# Altium PCB Camera_pcb.PcbDoc
Units mm, origin at the board's own origin, x right, y up, seen from the top; angles counter-clockwise.
Board outline 104 x 50 mm, 2 copper layers (Top Layer, Bottom Layer), stack 1.571 mm thick; 54 components, 62 nets, 286 pads, 164 vias.
Unrouted connection lines stored in the file: 1.
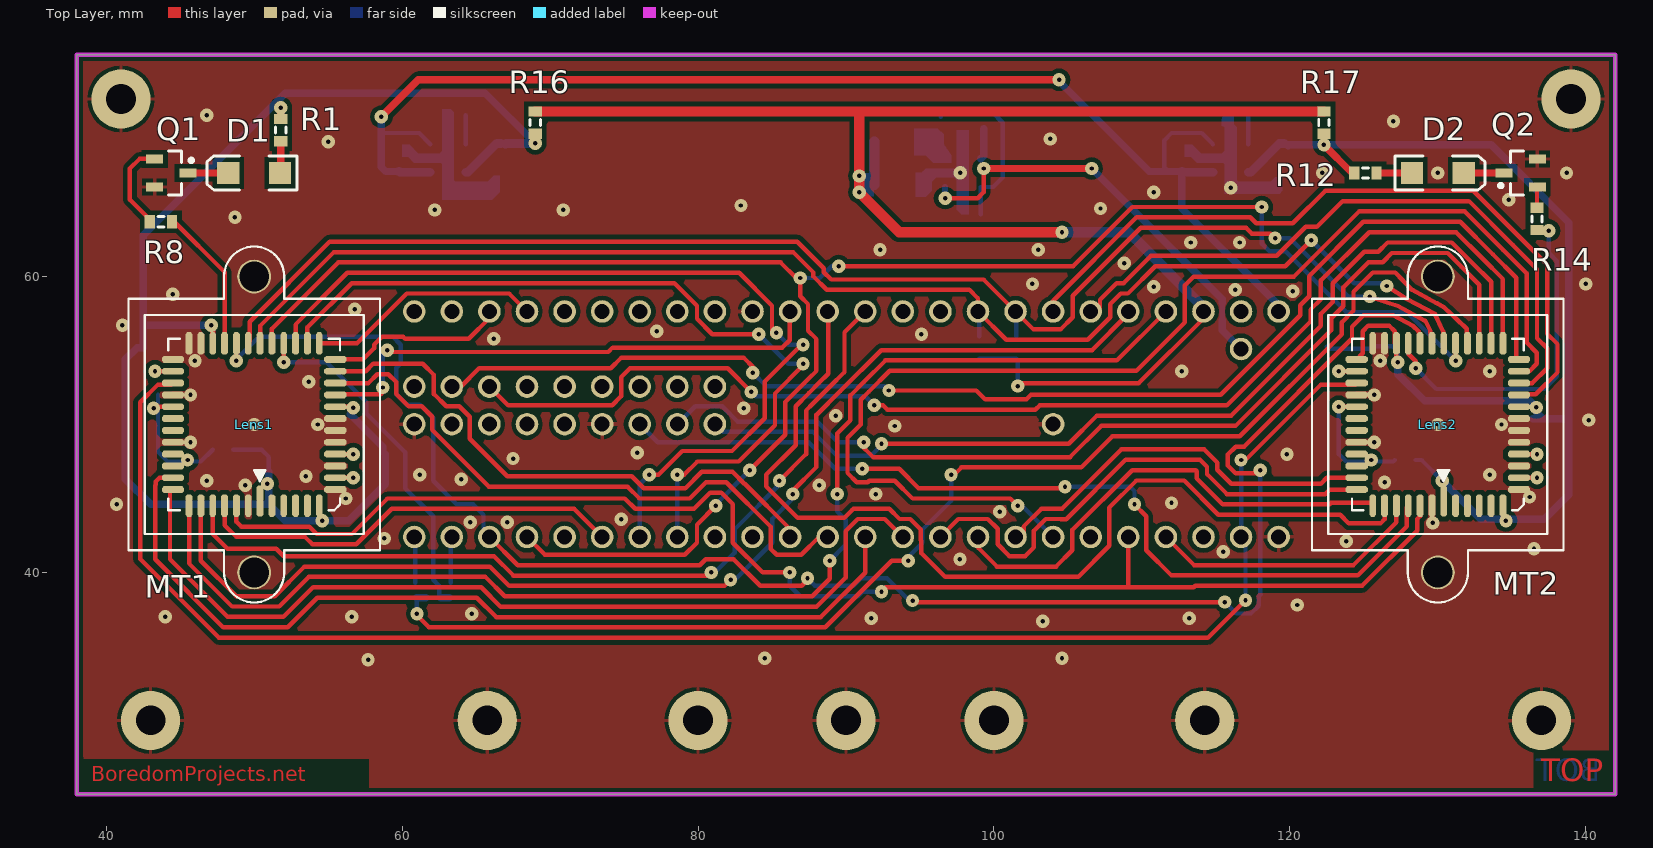
[diagram p0: Top Layer view]
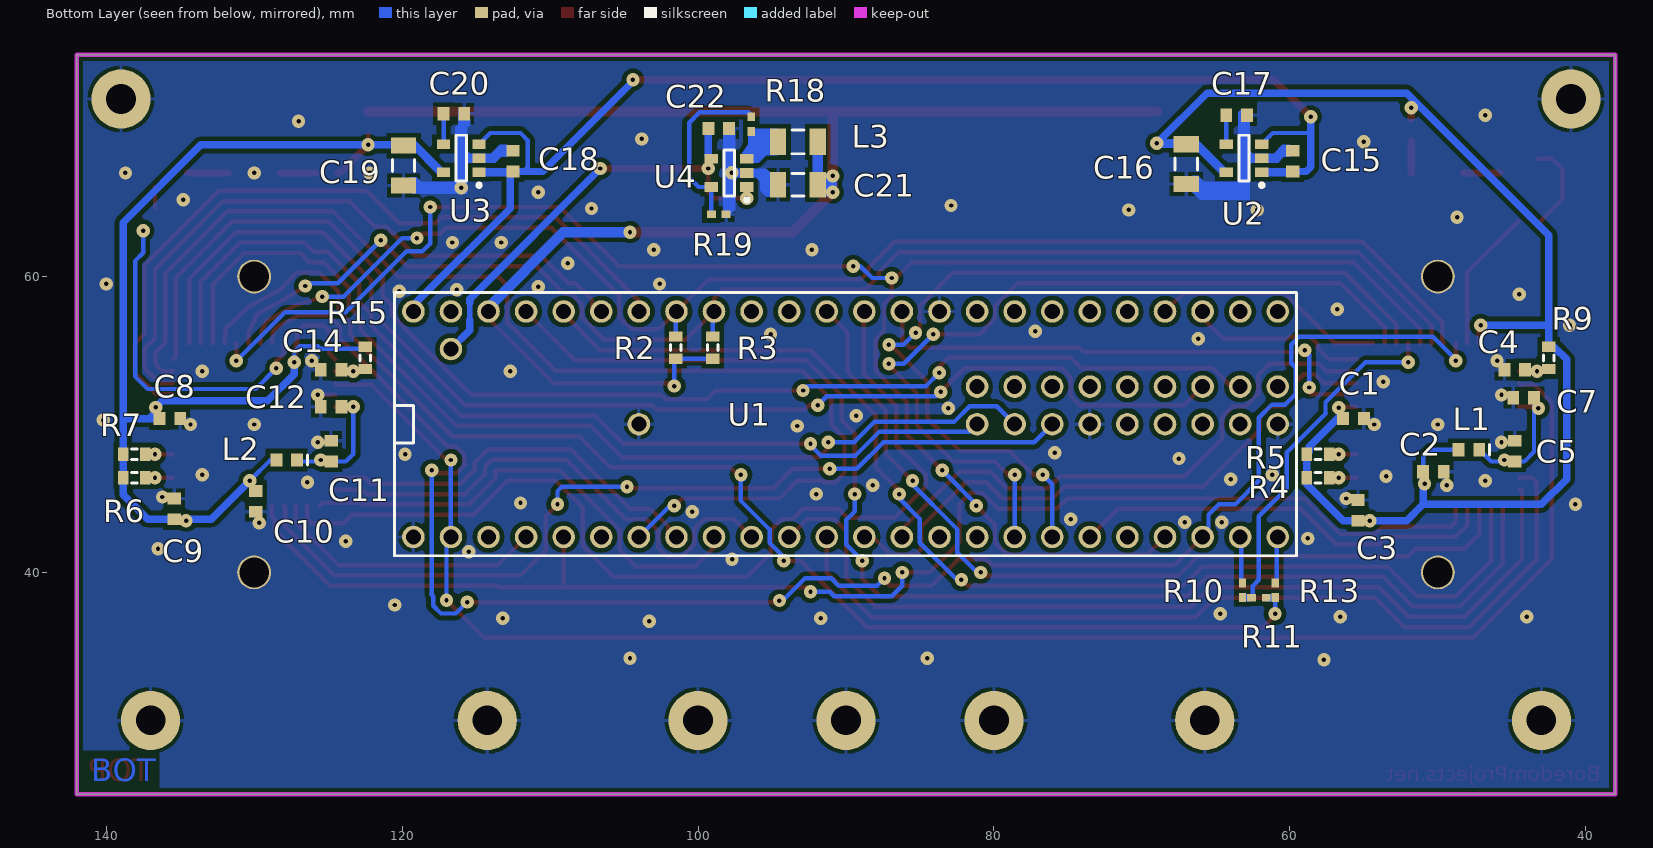
[diagram p1: Bottom Layer view, seen from below]

## Layer stack, top to bottom
Top Solder: solder mask 0.0102, Solder Resist, Dk 3.5
Top Layer: signal copper 0.0356
Dielectric 1: core 1.5, FR-4, Dk 4.2
Bottom Layer: signal copper 0.0356
Bottom Solder: solder mask 0.0102, Solder Resist, Dk 3.5

## Board outline
38,25 142,25 142,75 38,75

## Design rules (kind name [scope] priority, off if disabled: settings)
Clearance [All] p1: gap=0.3 except(0.4: Track-Track)
ComponentClearance [All] p1 off: gap=0.254 collisioncheckmode=3 verticalgap=0.254 showdistances=FALSE
HoleSize [All] p1: absolutevalues=TRUE maxlimit=2.54 minlimit=0.3 maxpercent=80.000 minpercent=20.000
MinimumSolderMaskSliver [All] p1: minsoldermaskwidth=0.125
PasteMaskExpansion [All] p1: expansion=-0.05
PolygonConnect PolygonConnect_Via [IsVia] p1: connectstyle=Direct reliefconductorwidth=0.254 reliefentries=4 polygonreliefangle="90 Angle" airgapwidth=0.254
PolygonConnect PolygonConnect_MT [All vs HasFootprint('CLCC_48')] p2: connectstyle=Direct reliefconductorwidth=0.254 reliefentries=4 polygonreliefangle="90 Angle" airgapwidth=0.254
PolygonConnect PolygonConnect_Lens [All vs HasFootprint('CCD_LENS_20MM')] p3: connectstyle=Direct reliefconductorwidth=0.254 reliefentries=4 polygonreliefangle="90 Angle" airgapwidth=0.254
PolygonConnect [All] p4: connectstyle=Relief reliefconductorwidth=0.254 reliefentries=4 polygonreliefangle="90 Angle" airgapwidth=0.254
RoomDefinition Camera_schematics [InComponentClass('Camera_schematics')] p1: confinementstyle=ConfineIn formatcopy=TRUE lockcomponents=FALSE outline 20.828,21.209 183.515,21.209 183.515,131.953 20.828,131.953
RoutingVias [All] p1: holewidth=0.3 width=0.9 viastyle="Through Hole" minholewidth=0.3 minwidth=0.9 maxholewidth=0.7 maxwidth=1.2
SilkToSilkClearance [All] p1: silktosilkclearance=0.1
SilkToSolderMaskClearance [IsPad] p1: minsilkscreentomaskgap=0.1 clearancetoexposedcopper=FALSE
SolderMaskExpansion [All] p1: expansion=0.06
Width [All] p1: maxlimit=1 minlimit=0.25 preferedwidth=0.3
24 further rules are at their usual default settings.

## Classes and differential pairs
net class Bus-C: C0 C1 C2 C3 C4 C5 C6 C7 C8 C9
net class bus-D: D0 D1 D2 D3 D4 D5 D6 D7 D8 D9

## Components (designator, comment, footprint, x,y, rotation, side; value= is the part's Value field where it differs from the comment)
C1 "0.1u" 1608[0603] 55.7,50.4 r0 bottom
C2 "0.1u" 1608[0603] 50.3,46.8 r0 bottom
C3 "0.1u" 1608[0603] 55.4,44.2 r270 bottom
C4 "0.1u" 1608[0603] 44.8,53.7 r0 bottom
C5 "0.1u" 1608[0603] 44.8,48.2 r270 bottom
C7 "0.1u" 1608[0603] 44.2,51.8 r180 bottom
C8 "0.1u" 1608[0603] 135.7,50.4 r0 bottom
C9 "0.1u" 1608[0603] 135.4,44.3 r270 bottom
C10 "0.1u" 1608[0603] 129.9,44.8 r90 bottom
C11 "0.1u" 1608[0603] 124.8,48.2 r270 bottom
C12 "0.1u" 1608[0603] 124.8,51.2 r180 bottom
C14 "0.1u" 1608[0603] 124.8,53.7 r0 bottom
C15 "0.1u" 1608[0603] 59.8,67.8 r270 bottom
C16 "4u7" C1206 67,67.6 r270 bottom
C17 "0.1u" 1608[0603] 63.6,70.9 r0 bottom
C18 "0.1u" 1608[0603] 112.5,67.8 r270 bottom
C19 "4u7" C1206 119.9,67.5 r270 bottom
C20 "0.1u" 1608[0603] 116.5,71 r0 bottom
C21 "10uF" C1206 93.25,66.2 r0 bottom
C22 "NP" 1608[0603] 98.6,70 r0 bottom
D1 "LED" 3.2X1.6X1.1 50,67 r180 top locked
D2 "LED" 3.2X1.6X1.1 130,67 r0 top locked
L1 "Bead" INDC1608L 47.9,48.3 r0 bottom
L2 "Bead" INDC1608L 127.8,47.6 r0 bottom
L3 "NP" INDC3216 93.25,69.1 r180 bottom
Lens1 "CCD" CCD_LENS_20MM 50,50 r270 top locked
Lens2 "CCD" CCD_LENS_20MM 130,50 r270 top locked
MT1 "MT9V034" CLCC_48 50,50 r180 top locked
MT2 "MT9V034" CLCC_48 130,50 r180 top locked
Q1 "MMBT3904" SOT23_N 44.4,67 r0 top
Q2 "MMBT3904" SOT23_N 135.6,67 r180 top
R1 "330" J1-0603 51.8,69.9 r90 top
R2 "1K5" J1-0603 101.5,55.2 r270 bottom
R3 "1K5" J1-0603 99,55.2 r270 bottom
R4 "1K5" J1-0603 58.1,46.4 r180 bottom
R5 "1K5" J1-0603 58.1,48 r180 bottom
R6 "1K5" J1-0603 138.1,46.4 r180 bottom
R7 "1K5" J1-0603 138.1,48 r180 bottom
R8 "4K7" J1-0603 43.7,63.7 r180 top
R9 "12K" J1-0603 42.5,54.5 r90 bottom
R10 "0R" 0402 63.2,38.8 r90 bottom
R11 "0R" 0402 62.1,38.3 r0 bottom
R12 "330" J1-0603 125.1,67 r180 top
R13 "NP" 0402 61,38.8 r90 bottom
R14 "4K7" J1-0603 136.7,63.9 r90 top
R15 "12K" J1-0603 122.5,54.5 r90 bottom
R16 "NP" J1-0603 69,70.4 r90 top
R17 "NP" J1-0603 122.3,70.4 r90 top
R18 "NP" 0402 96.4,70.3 r270 bottom
R19 "NP" 0402 98.6,64.2 r0 bottom
U1 "Teensy3_6" TEENSY3.6-MOST-PINS 119.24,42.4 r90 bottom locked
U2 "TPS79333" SOT23-5_L 63.1,68 r0 bottom
U3 "TPS79333" SOT23-5_L 116,68 r0 bottom
U4 "NP" SOT23-5_L 97.9,67 r0 bottom

## Footprints (in the part's own frame and the unit in brackets; to place one, negate y for a bottom-side part, rotate by r counter-clockwise, add the part's x,y. Pads: shape width x height; smd on the part's side, far side on the other; paste and mask are expansions set on the pad)
3.2X1.6X1.1 [mm] "SMT LED; 2 Flat Leads"
  rect 1.5x1.5 smd: 1(-1.75,0) 2(1.75,0)
  silkscreen extent -2.9,-1.15 3.2,1.15
0402 [mm] "Chip Capacitor, Body 1.0x0.5mm, IPC High Density"
  rect 0.6x0.5 smd: 1(-0.5,0) 2(0.5,0)
  body extent -0.55,-0.3 0.55,0.3, height 1.3
1608[0603] [mm] "Chip Capacitor, Body 1.6x0.8mm, IPC High Density"
  rect 0.8x0.9 smd: 1(-0.7,0) 2(0.7,0)
  body extent -0.87,-0.48 0.87,0.48, height 1.3
C1206 [mm] "Chip Capacitor, Body 3.2x1.6mm, IPC High Density"
  rect 1.1x1.7 smd: 1(-1.35,0) 2(1.35,0)
  silkscreen extent -0.4,-0.75 0.4,0.75, body extent -1.7,-0.9 1.7,0.9, height 1.3
CCD_LENS_20MM [mm]
  round 2.286 hole 2 mask+0: 0(-10,0) 0(10,0)
  silkscreen extent -12.03,-8.5 12.03,8.5, body extent -12.22,-8.62 12.23,8.63, height 14.15
CLCC_48 [mm] "LCC, 48-Pins, Body 11.43mmx11.43mmx2.30mm, Pitch 0.80mm, IPC Medium Density"
  oct 0.46x2.1 smd: 1(-0.4,5.182)
  oct 0.46x1.5 smd: 2(-1.2,5.486) 3(-2,5.486) 4(-2.8,5.486) 5(-3.6,5.486) 6(-4.4,5.486) 19(-4.4,-5.486) 20(-3.6,-5.486) 21(-2.8,-5.486) 22(-2,-5.486) 23(-1.2,-5.486) 24(-0.4,-5.486) 25(0.4,-5.486) 26(1.2,-5.486) 27(2,-5.486) 28(2.8,-5.486) 29(3.6,-5.486) 30(4.4,-5.486) 43(4.4,5.486) 44(3.6,5.486) 45(2.8,5.486) 46(2,5.486) 47(1.2,5.486) 48(0.4,5.486)
  oct 1.5x0.46 smd: 7(-5.486,4.4) 8(-5.486,3.6) 9(-5.486,2.8) 10(-5.486,2) 11(-5.486,1.2) 12(-5.486,0.4) 13(-5.486,-0.4) 14(-5.486,-1.2) 15(-5.486,-2) 16(-5.486,-2.8) 17(-5.486,-3.6) 18(-5.486,-4.4) 31(5.486,-4.4) 32(5.486,-3.6) 33(5.486,-2.8) 34(5.486,-2) 35(5.486,-1.2) 36(5.486,-0.4) 37(5.486,0.4) 38(5.486,1.2) 39(5.486,2) 40(5.486,2.8) 41(5.486,3.6) 42(5.486,4.4)
  silkscreen extent -5.8,-5.8 5.8,5.8, body extent -5.7,-5.7 5.7,5.7, height 2.3
INDC1608L [mm] "Chip Inductor, Body 1.6x0.8mm, IPC High Density"
  rect 0.8x0.9 smd: 1(-0.7,0) 2(0.7,0)
  silkscreen extent -1.4,-0.35 -1.4,0.35, body extent -0.87,-0.48 0.87,0.48, height 0.55
INDC3216 [mm] "Chip Inductor, Body 3.2x1.6mm, IPC High Density"
  rect 1.1x1.8 smd: 1(-1.35,0) 2(1.35,0)
  silkscreen extent -0.4,-0.8 0.4,0.8, body extent -1.7,-0.9 1.7,0.9, height 0.55
J1-0603 [mm] "Chip Resistor, Body 1.6x0.8mm, IPC High Density"
  rect 0.7x0.9 smd: 1(-0.75,0) 2(0.75,0)
  silkscreen extent -0.2,-0.35 0.2,0.35, body extent -0.85,-0.48 0.85,0.48, height 0.9
SOT23-5_L [mm] "SOT23, 5-Leads, Body 2.9x1.6mm, Pitch 0.95mm, Lead Span 2.7mm, IPC High Density"
  rect 0.9x0.65 smd: 1(-1.2,0.95) 2(-1.2,0) 3(-1.2,-0.95) 4(1.2,-0.95) 5(1.2,0.95)
  silkscreen extent -1.32,-1.55 0.35,1.95, body extent -0.9,-1.55 0.9,1.55, height 1.45
SOT23_N [mm] "SOT23, 3-Leads, Body 2.9x1.3mm, Pitch 0.95mm, Lead Span 2.3mm - Reverse Pinning, IPC Medium Density"
  rect 1.15x0.6 smd: 1(1.125,0) 2(-1.125,-0.95) 3(-1.125,0.95)
  silkscreen extent -0.2,-1.5 1.48,1.5, body extent -0.7,-1.5 0.7,1.5, height 1.1
TEENSY3.6-MOST-PINS [mil]
  round 60 hole 40: 0(0,-100) 1(0,-200) 2(0,-300) 3(0,-400) 3V3(0,-1400) 3V3(400,-2300) 3V3(600,-200) 4(0,-500) 5(0,-600) 6(0,-700) 7(0,-800) 8(0,-900) 9(0,-1000) 10(0,-1100) 11(0,-1200) 12(0,-1300) 13(600,-1300) 14(600,-1200) 15(600,-1100) 16(600,-1000) 17(600,-900) 18(600,-800) 19(600,-700) 20(600,-600) 21(600,-500) 22(600,-400) 23(600,-300) 24(0,-1500) 25(0,-1600) 26(0,-1700) 27(0,-1800) 28(0,-1900) 29(0,-2000) 30(0,-2100) 31(0,-2200) 32(0,-2300) 33(600,-2300) 34(600,-2200) 35(600,-2100) 36(600,-2000) 37(600,-1900) 38(600,-1800) 39(600,-1700) 40(300,-1500) 41(300,-1600) 42(300,-1700) 43(300,-1900) 44(300,-2000) 45(300,-2100) 46(300,-2200) 47(400,-2200) 48(400,-2100) 49(400,-2000) 50(400,-1900) 51(400,-1700) 52(400,-1600) 53(400,-1500) A21(600,-1600) A22(600,-1500) AGND(600,-100) GND(0,0) GND(300,-2300) GND(300,-1800) GND(300,-600) GND(600,-1400) PROG(400,-1800) VIN(600,0) VUSB(500,-100)
  silkscreen extent -50,-2350 650,50, body extent -50,-2350 650,50, height 118

## Part data
C1 C2 C3 C4 C5 C7 C8 C9 C10 C11 C12 C14 C15 C17 C18 C20 C22: library part "Cap Semi", "Capacitor (Semiconductor SIM Model)"
C16 C19 C21: library part "Cap Pol3", "Polarized Capacitor (Surface Mount)"
D1 D2: library part LED2, "Typical RED, GREEN, YELLOW, AMBER GaAs LED"
L1 L2 L3: library part Inductor, "Inductor"
Lens1 Lens2: library part lensCCD_20
MT1 MT2: "CMOS"
Q1 Q2: library part NPN, "NPN Bipolar Transistor"
R1 R2 R3 R4 R5 R6 R7 R8 R9 R10 R11 R12 R13 R14 R15 R16 R17 R18 R19: library part Res1, "Resistor"
U2 U3: "200-mA Low-Dropout Linear Regulator"
U4: library part AP3417C, "1.5MHz SYNCHRONOUS STEP-DOWN DC-DC CONVERTER"

## Free pads (board coordinates)
  round 4 hole 2: 0(41,72) 0(43,30) 0(65.75,30) 0(80,30) 0(90,30) 0(100,30) 0(114.25,30) 0(137,30) 0(139,72)

## Via types
v1: diameter 0.9, hole 0.3, Top Layer to Bottom Layer, tented both sides, 164 vias

## Nets (pads, with @x,y where several pads share a name; then routed paths per layer and width w, separated by ;. In a path a pad name is that pad's centre, name@x,y a point inside that pad or via, vN(x,y) a via of type N, cw(c..) or ccw(c..) an arc to the next point about the centre after c; other vN are vias at no path point)
3V3_MT1: C1.2 C2.2 C3.2 C16.1 L1.2 MT1.1 MT1.6 MT1.14 MT1.28 R1.2 R4.1 R5.1 R9.2 R16.1 U2.5 | length 93.5
  Top Layer w0.3: v1(47.1,56.712) 47.188,56.712 v1@47.2,56.7 ; MT1.14 56.7,51.2 56.693,51.193 v1(56.693,51.13)
  Top Layer w0.4: MT1.28 v1@47.2,56.7
  Top Layer w0.5: R1.2 v1(51.8,71.4)
  Bottom Layer w0.3: L1.2 50.5,48.3 51,47.8 C2.2
  Bottom Layer w0.5: R9.2@42.5,55.2 42.1,55.2 41.3,54.4 41.3,46.3 43,44.6 51,44.6 ; R9.2 42.5,56.712 ; v1(47.1,56.712) 42.5,56.712 ; C2.2 51,44.6 ; C1.2@56.5,50.7 58.7,48.5 58.7,48.15 R5.1 R4.1 58.85,45.95 56.4,43.5 C3.2 v1(54.6,43.5) 52.1,43.5 51,44.6 ; v1(69,69) 65.6,72.4 52.1,72.4 42.5,62.8 42.5,56.712
  Bottom Layer w0.6: U2.5 64.45,67.05 66.4,69 C16.1@66.7,69 ; C16.1 67.05,69 v1(69,69)
  other v1: 50.9,46
3V3_MT2: C8.2 C9.2 C10.2 C19.1 L2.2 MT2.1 MT2.6 MT2.14 MT2.28 MT2.31 R6.1 R7.1 R12.2 R15.2 R17.1 U3.5 | length 85.9
  Top Layer w0.3: v1(122.3,68.9) R17.1 ; MT2.31 124.92,54.806 124.92,56.308 125.299,56.686 126.701,56.686 127.08,56.308 127.08,55.486 MT2.28 v1@127.2,54.361
  Top Layer w0.5: v1(122.3,68.9) 124.2,67 R12.2
  Bottom Layer w0.3: R15.2 122.643,55.107 125.493,55.107 125.686,55.3 126.9,55.3 127.3,54.9 v1(127.3,54.2) ; L2.2 128.9,47.6 v1(130.3,46.2)
  Bottom Layer w0.5: C19.1 119.95,68.9 v1(122.3,68.9) 133.6,68.9 138.85,63.65 138.85,50.4 ; v1(127.3,54.2) 127.3,53.4 129.1,51.6 136.212,51.6 v1(136.658,51.154) 136.658,50.842 137.1,50.4 ; v1(130.3,46.2) 132.9,43.6 C9.2 137.2,43.6 138.85,45.25 R6.1 138.85,50.4 ; C8.2 138.85,50.4
  Bottom Layer w0.6: U3.5 117.35,67.05 119.3,69 C19.1@119.6,69
  other v1: 134.6,43.5
3V3_UC: C21.1 L3.2 R2.2 R3.2 R16.2 R17.2 U1.3V3 | length 107.7
  Top Layer w0.3: v1(101.6,52.6) 101.8,52.8 109.79,52.8 114.16,57.17 U1.3V3@114.16,57.64
  Top Layer w0.7: R16.2 90.9,71.15 ; v1(104.6,63) 93.6,63 v1(90.9,65.7) v1(90.9,66.8) 90.9,71.15 ; R17.2 90.9,71.15
  Bottom Layer w0.3: R3.2 R2.2 101.6,54.35 v1(101.6,52.6)
  Bottom Layer w0.7: C21.1 L3.2 ; v1(104.6,63) 109.1,63 114.16,57.94 U1.3V3@114.16,57.64
C0: MT1.45 U1.15 | length 59.2
  Top Layer w0.3: MT1.45 47.2,42.6 48.2,41.6 51.5,41.6 52,41.1 66.21,41.1 67.522,39.788 80.688,39.788 v1(80.9,40) ; v1(85.5,46.2) 87.3,48 87.3,50.943 87.757,51.4 88.9,52.543 89.9,53.543 89.9,56.24 U1.15
  Bottom Layer w0.3: v1(80.9,40) 81.136,40 82.468,41.332 82.468,42.902 85.7,46.134 85.634,46.2 v1(85.5,46.2)
C1: MT1.44 U1.22 | length 79.9
  Top Layer w0.3: MT1.44 46.4,40.8 48.8,38.4 51.4,38.4 53.4,40.4 65.92,40.4 67.232,39.088 81.788,39.088 v1(82.2,39.5) ; v1(86.4,45.3) 86.4,45.527 88,47.127 88,50.653 88.047,50.7 89.6,52.253 92.375,55.028 106.632,55.028 109.08,57.476 U1.22
  Bottom Layer w0.3: v1(82.2,39.5) 82.5,39.5 85.008,42.008 85.008,43.62 86.4,45.012 v1(86.4,45.3)
C2: MT1.43 U1.23 | length 87.4
  Top Layer w0.3: MT1.43 45.6,40.61 48.51,37.7 51.69,37.7 53.69,39.7 65.63,39.7 66.942,38.388 87.718,38.388 88.9,39.57 v1(88.9,40.8) ; v1(89.4,45.3) 89.4,49.39 90.3,50.29 90.3,51.963 91.237,52.9 92.665,54.328 108.308,54.328 U1.23
  Bottom Layer w0.3: v1(88.9,40.8) 89.972,41.872 89.972,43.554 89.4,44.126 v1(89.4,45.3)
C3: MT1.42 U1.9 | length 62.2
  Top Layer w0.3: MT1.42 44.313,45.6 44.313,40.887 48.2,37 51.98,37 53.98,39 65.34,39 66.652,37.688 88.008,37.688 89.972,39.652 89.972,42.786 90.798,43.612 92.628,43.612 U1.9
C4: MT1.41 U1.10 | length 61.5
  Top Layer w0.3: MT1.41 43.602,46.4 43.348,46.146 43.348,45.936 43.314,45.901 43.314,40.886 47.9,36.3 52.27,36.3 54.27,38.3 65.05,38.3 66.362,36.988 88.298,36.988 91.3,39.99 U1.10
C5: MT1.15 U1.13 | length 35.8
  Top Layer w0.3: MT1.15 55.54,52.054 58.554,52.054 58.699,52.199 v1(58.699,52.502) ; v1(59.004,55.016) 59.121,54.9 73.925,54.9 74.225,55.2 85.7,55.2 86.2,55.7 86.2,57.62 U1.13
  Bottom Layer w0.3: v1(58.699,52.502) 58.699,54.712 v1(59.004,55.016)
C6: MT1.16 U1.11 | length 41.9
  Top Layer w0.3: MT1.16 57.725,52.8 58.327,53.402 59.072,53.402 59.6,52.874 59.6,52.066 60.434,51.232 61.322,51.232 62.032,50.522 62.032,49.634 65.866,45.8 75.237,45.8 76.037,45 79.437,45 80.537,46.1 81.9,46.1 84.9,43.1 84.9,41.6 85.312,41.188 86.968,41.188 88.18,42.4 U1.11
C7: MT1.17 U1.12 | length 38.6
  Top Layer w0.3: MT1.17 57.535,53.6 58.037,54.102 61.398,54.102 62.148,53.352 62.148,52.058 62.974,51.232 63.862,51.232 64.572,50.522 64.572,49.028 67.1,46.5 75.527,46.5 76.327,45.7 79.147,45.7 80.247,46.8 82.327,46.8 83.127,46 83.153,46 86.22,42.933 U1.12
C8: MT1.18 U1.35 | length 12.3
  Top Layer w0.3: MT1.18 57.345,54.4 58.104,55.159 58.104,55.389 58.657,55.942 60.063,55.942 60.205,55.8 64.5,55.8 65.9,57.2 U1.35
C9: MT1.19 U1.36 | length 15.9
  Top Layer w0.3: MT1.19 56.952,55.486 60.318,58.852 67.228,58.852 U1.36
D0: MT2.45 U1.2 | length 18.7
  Top Layer w0.3: U1.2 113.52,40.5 124.3,40.5 127.2,43.4 MT2.45
D1: MT2.44 U1.14 | length 65.8
  Top Layer w0.3: U1.14 88.8,57.6 88.8,53.433 88.2,52.833 87.467,52.1 86.6,51.233 86.6,48.6 84.6,46.6 84.6,45.827 85.327,45.1 86.727,43.7 89.896,43.7 90.403,44.207 90.508,44.312 92.918,44.312 93.618,43.612 94.342,43.612 95.052,42.902 95.052,42.178 95.1,42.13 95.1,41.3 96.7,39.7 105.7,39.7 107.8,41.8 107.8,44.384 109.63,46.214 112.853,46.214 115.168,43.9 123.4,43.9 123.986,43.314 126.124,43.314 126.4,43.59 MT2.44
D2: MT2.43 U1.7 | length 32.8
  Top Layer w0.3: U1.7 98.92,41.68 100.2,40.4 104.2,40.4 105.3,41.5 105.3,42.874 109.34,46.914 113.633,46.914 113.7,46.848 113.7,46.358 115.457,44.6 122.68,44.6 122.78,44.7 125.414,44.7 MT2.43
D3: MT2.42 U1.8 | length 35
  Top Layer w0.3: U1.8 97.592,43.612 99.588,43.612 100.248,42.952 100.248,41.898 101.04,41.106 102.106,41.106 102.7,41.7 102.7,42.814 103.498,43.612 104.502,43.612 104.514,43.6 104.882,43.6 108.896,47.614 113.923,47.614 114.4,47.137 114.4,46.648 115.747,45.3 122.39,45.3 122.69,45.6 MT2.42
D4: MT2.41 U1.6 | length 27.3
  Top Layer w0.3: U1.6 102,42.4 102,43.104 103.208,44.312 104.604,44.312 108.606,48.314 114.213,48.314 115.1,47.427 115.1,46.937 116.037,46 122.1,46 122.5,46.4 MT2.41
D5: MT2.15 U1.20 | length 50.4
  Top Layer w0.3: U1.20 104,58.363 109.637,64 117.327,64 117.727,63.6 120.2,63.6 122.4,65.8 131.8,65.8 132.393,65.8 137.4,60.793 137.4,56.12 138.086,55.434 138.086,53.519 136.622,52.054 135.54,52.054 MT2.15
D6: MT2.16 U1.21 | length 44.8
  Top Layer w0.3: U1.21 106.94,57.64 107.168,57.868 107.168,58.432 108.288,59.552 108.762,59.552 110.61,61.4 119.106,61.4 121.065,63.359 121.81,63.359 121.82,63.349 123.571,65.1 132.103,65.1 135.1,62.103 135.1,62.1 136.7,60.5 136.7,55.83 137.386,55.144 137.386,53.809 136.378,52.8 MT2.16
D7: MT2.17 U1.5 | length 82.4
  Top Layer w0.3: v1(101.6,44.5) 101.1,45 94.5,45 93.3,46.2 91.573,46.2 91.473,46.1 90.727,46.1 90.1,46.727 90.1,49.1 91,50 91,51.673 91.527,52.2 92.955,53.628 109.628,53.628 112.9,56.9 112.9,59.4 113.5,60 120.278,60 124.678,64.4 131.813,64.4 134.4,61.813 134.4,61.81 136,60.21 136,55.54 136.686,54.854 136.686,54.099 136.188,53.6 MT2.17
  Bottom Layer w0.3: v1(101.6,44.5) 101.9,44.5 U1.5 U1.5@104.038,42.438
D8: MT2.18 U1.47 | length 87.5
  Top Layer w0.3: U1.47 63.96,52.56 65.2,53.8 74.1,53.8 74.8,54.5 83.1,54.5 83.7,53.9 v1(83.7,53.5) ; v1(92.9,52.3) 98.8,52.3 99.4,51.7 102.2,51.7 102.505,52.005 115.319,52.005 120.7,57.386 120.7,58.06 121.3,58.66 121.3,60.033 124.967,63.7 131.523,63.7 133.7,61.523 133.7,61.52 135.3,59.92 135.3,54.586 MT2.18
  Bottom Layer w0.3: v1(83.7,53.5) 84.6,52.6 92.6,52.6 v1(92.9,52.3)
D9: MT2.19 U1.48 | length 83.8
  Top Layer w0.3: U1.48 67.16,51.3 74.2,51.3 74.8,51.9 74.8,53.2 75.4,53.8 82,53.8 v1(83.6,52.2) ; v1(91.9,51.3) 92.5,51.3 92.8,51 102.8,51 103.105,51.305 115.745,51.305 121.4,56.96 121.4,57.77 122.1,58.47 122.1,59.743 125.357,63 131.233,63 132.993,61.24 132.993,61.237 134.4,59.83 MT2.19
  Bottom Layer w0.3: v1(83.6,52.2) 83.9,51.9 91.3,51.9 v1(91.9,51.3)
EXPOSURE: MT1.23 MT2.23 U1.29 | length 126.2
  Top Layer w0.3: MT1.23 51.2,56.473 55.679,60.952 85.58,60.952 86.632,59.9 v1(86.9,59.9) 86.9,58.674 87.432,58.142 87.432,56.341 88,55.773 88,53.623 87.5,53.123 87.177,52.8 85.9,51.523 85.9,49.3 v1(83.5,46.9) ; U1.29 69.652,41.188 79.102,41.188 79.928,42.014 79.928,43.228 v1(81.2,44.5) ; v1(89.5,60.7) 105.347,60.7 109.347,64.7 v1(118.1,64.7) ; v1(131.2,54.3) MT2.23
  Bottom Layer w0.3: v1(81.2,44.5) 81.2,44.6 v1(83.5,46.9) ; v1(86.9,59.9) 88.232,59.9 89.032,60.7 v1(89.5,60.7) ; v1(118.1,64.7) 118.1,62.227 118.627,61.7 119.7,61.7 123.8,57.6 127.9,57.6 v1(131.2,54.3)
FRVAL1: MT1.21 U1.26 | length 59.9
  Top Layer w0.3: MT1.21 52.8,56.753 56.299,60.252 82.782,60.252 85,58.034 v1@85,56.1 ; v1(76.7,46.6) 77.327,46.6 78.936,48.209 82.296,48.209 84.5,50.413 84.5,52.9 87,55.4 v1(87.1,55.4)
  Bottom Layer w0.3: U1.26 76.06,45.96 v1(76.7,46.6) ; v1(85.3,56.2) 86.1,55.4 v1(87.1,55.4)
FRVAL2: MT2.21 U1.41 | length 68.2
  Top Layer w0.3: v1@90.895,48.895 90.895,48.732 91.827,47.8 92.673,47.8 105.143,47.8 107.248,49.905 116.325,49.905 122.8,56.38 122.8,57.19 123.6,57.99 123.6,59.263 125.311,60.974 126.274,60.974 126.893,61.593 130.66,61.593 131.593,60.66 131.593,60.657 132.8,59.45 MT2.21
  Bottom Layer w0.3: U1.41 79.812,51.232 81.642,51.232 82.674,50.2 88.053,50.2 89.453,48.8 90.8,48.8 v1@91,49
  other v1: 91.2,48.8
GND: C1.1 C2.1 C3.1 C4.2 C5.1 C7.1 C8.1 C9.1 C10.1 C11.1 C12.1 C14.2 C15.1 C16.2 C17.1 C18.1 C19.2 C20.1 C21.2 C22.1 Lens1.0 Lens2.0 MT1.7 MT1.9 MT1.11 MT1.12 MT1.13 MT1.29 MT1.30 MT1.31 MT1.34 MT1.38 MT1.48 MT2.7 MT2.9 MT2.11 MT2.12 MT2.13 MT2.29 MT2.30 MT2.34 MT2.38 MT2.48 pad.0 Q1.2 Q2.2 R19.1 U1.GND U2.2 U3.2 U4.2 | length 1.2
  Top Layer w0.3: MT2.34 v1(125.7,52)
  other v1: 57.7,34.1 84.5,34.2 104.6,34.2 103.3,36.7 91.7,36.9 113.2,36.9 44,37 56.6,37 64.7,37.2 120.5,37.8 97.7,40.9 115.5,41.4 136.5,41.6 123.8,42.1 58.8,42.3 129.646,43.347 64.6,43.4 67.1,43.4 74.8,43.6 100.4,44.1 40.7,44.6 112,44.7 56.2,45 136.2,45.1 92,45.3 49.4,45.9 88.2,45.9 126.4,46.1 46.8,46.2 64,46.3 53.5,46.5 61.2,46.6 133.5,46.6 67.5,47.7 119.8,48 75.9,48.1 45.7,48.8 125.7,48.8 93.3,49.9 50,50 54.3,50 130,50 134.3,50 140.2,50.3 89.3,50.6 83.1,51.1 45.7,52 53.7,52.9 112.7,53.6 133.5,53.6 46,54.3 126.1,54.3 66.2,55.8 95.1,56.1 77.2,56.3 41.1,56.7 56.8,57.8 44.5,58.8 120.2,59 116.3,59.1 110.8,59.3 102.6,59.5 140,59.5 108.8,60.9 92.3,61.8 103,61.8 113.3,62.3 116.6,62.3 48.7,64 62.2,64.5 70.9,64.5 107.2,64.6 82.9,64.8 134.8,65.2 110.8,65.7 116,66 97.714,67.005 122.2,67 130,67 138.7,67 55,69.1 103.8,69.3 127,70.5 46.8,70.9
LNVAL1: MT1.20 U1.25 | length 55.7
  Top Layer w0.3: MT1.20 53.6,56.564 56.588,59.552 78.402,59.552 79.928,58.026 79.928,57.138 80.966,56.1 v1(84.1,56.1) ; v1(78.6,46.6) 79.057,46.6 79.957,47.5 82.755,47.5 85.2,49.945 85.2,52.095 87.1,53.995 v1(87.1,54.1)
  Bottom Layer w0.3: U1.25 v1(78.6,46.6) ; v1(84.1,56.1) 86.1,54.1 v1(87.1,54.1)
LNVAL2: MT2.20 U1.40 | length 66.1
  Top Layer w0.3: v1(92.4,48.7) 105.053,48.7 106.958,50.605 116.035,50.605 122.1,56.67 122.1,57.48 122.9,58.28 122.9,59.553 125.022,61.674 125.974,61.674 126.6,62.3 130.943,62.3 132.293,60.95 132.293,60.947 133.6,59.64 MT2.20
  Bottom Layer w0.3: U1.40 81.66,49.5 87.763,49.5 89.363,47.9 91.7,47.9 92.364,48.564 92.314,48.614 92.227,48.7 v1(92.4,48.7)
NetC4_1: C4.1 MT1.32 R9.1 | length 1.2
  Top Layer w0.3: v1(43.3,53.6) MT1.32
NetC5_2: C5.2 C7.2 L1.1 MT1.35 MT1.39 MT1.40 | length 9.5
  Top Layer w0.3: v1(43.2,51.1) 43.3,51.2 MT1.35
  Bottom Layer w0.3: C7.2@43.5,52 43.5,48.15 44.15,47.5 C5.2 46.4,47.5 L1.1
  other v1: 45.5,47.6
NetC11_2: C11.2 C12.2 L2.1 MT2.35 MT2.39 MT2.40 | length 9.3
  Top Layer w0.3: v1(123.3,51.2) MT2.35
  Bottom Layer w0.3: C12.2 v1(123.3,51.2) 123.3,48 123.8,47.5 C11.2 127,47.5 L2.1
  other v1: 125.5,47.6
NetC14_1: C14.1 MT2.32 R15.1 | length 1.2
  Top Layer w0.3: v1(123.3,53.6) MT2.32
NetC15_2: C15.2 C18.2 U1.VIN U2.1 U2.3 U3.1 U3.3 | length 88.5
  Top Layer w0.5: v1(58.6,70.8) 61.1,73.3 v1(104.4,73.3)
  Bottom Layer w0.3: 58.6,69.7 61.15,69.7 U2.3 ; 111.8,67.1 111.5,67.4 111.5,69.2 112,69.7 114.05,69.7 U3.3
  Bottom Layer w0.5: v1(58.6,70.8) 58.6,69.7 58.6,67.4 58.9,67.1 C15.2 ; v1@104.35,73.25 110.5,67.1 111.8,67.1 112.7,67.1 112.7,64.6 119.24,58.06 U1.VIN
  Bottom Layer w0.6: C15.2 59.85,67.05 U2.1 ; C18.2@112.7,67.1 112.75,67.05 U3.1
NetC17_2: C17.2 U2.4 | length 1.9
  Bottom Layer w0.3: U2.4 C17.2
NetC20_2: C20.2 U3.4 | length 1.9
  Bottom Layer w0.3: U3.4 C20.2@117.2,70.9
NetC22_2: C22.2 U1.VUSB U4.1 U4.4 | length 30.9
  Top Layer w0.3: v1(96.7,65.3) 98.9,65.3 99.3,65.7 v1(99.3,67.3)
  Top Layer w0.5: v1(99.3,67.3) v1(106.6,67.3)
  Bottom Layer w0.4: v1(96.7,65.3) U4.1 ; 115.43,57.055 115.43,58.225
  Bottom Layer w0.5: U4.4 99.3,68.15 C22.2 ; v1(106.6,67.3) 115.43,58.47 115.43,58.225 ; 115.43,57.055 115.43,56.37 U1.VUSB
NetD1_1: D1.1 R1.1 | length 2.2
  Top Layer w0.5: D1.1 51.8,67.05 R1.1
NetD1_2: D1.2 Q1.1 | length 2.4
  Top Layer w0.5: Q1.1@45.8,67 D1.2
NetD2_1: D2.1 R12.1 | length 2.4
  Top Layer w0.5: R12.1 D2.1
NetD2_2: D2.2 Q2.1 | length 2.7
  Top Layer w0.5: D2.2 Q2.1
NetL3_1: L3.1 R18.2 U4.3
NetMT1_8: MT1.8 R4.2 | length 1.2
  Top Layer w0.3: MT1.8 v1(56.7,46.4)
NetMT1_10: MT1.10 R5.2 | length 1.2
  Top Layer w0.3: MT1.10 v1(56.7,48)
NetMT1_22: MT1.22 R10.1 R11.2 | length 23.9
  Top Layer w0.3: v1(52,54.2) MT1.22
  Bottom Layer w0.3: v1(52,54.2) 54.896,54.2 57.593,51.503 57.593,50.757 57.583,50.748 60.2,48.131 60.2,45.7 62.1,43.8 62.1,39.5 62.5,39.1 62.5,38.4 R11.2
  Bottom Layer w0.5: R11.2 R10.1
NetMT1_27: MT1.27 R8.1 | length 9.7
  Top Layer w0.3: R8.1@44.525,63.775 48,60.3 MT1.27
NetMT2_8: MT2.8 R6.2 | length 1.2
  Top Layer w0.3: MT2.8 v1(136.7,46.4)
NetMT2_10: MT2.10 R7.2 | length 1.2
  Top Layer w0.3: MT2.10 v1(136.7,48)
NetMT2_22: MT2.22 R11.1 R13.1 | length 88.7
  Top Layer w0.3: v1(61,37.2) 61,37.1 61.812,36.288 88.588,36.288 93.1,40.8 v1(94.2,40.8) ; v1(97.1,46.6) 97.3,46.6 97.8,47.1 105.9,47.1 108.005,49.205 116.615,49.205 123.5,56.09 123.5,56.9 124.3,57.7 124.3,58.973 125.601,60.274 127.118,60.274 128.225,59.111 129.946,58.191 130.404,57.937 131.953,56.464 MT2.22
  Bottom Layer w0.3: v1(61,37.2) R13.1 ; v1(94.2,40.8) 94.154,40.8 94.054,40.9 95.168,42.014 95.168,42.902 97.1,44.834 v1@97.1,46.5 ; v1@96.9,46.3 v1@97.1,46.5 ; v1(97.1,46.6) v1@97.1,46.5
  Bottom Layer w0.5: R13.1 R11.1
NetMT2_27: MT2.27 R14.1 | length 22.5
  Top Layer w0.3: MT2.27 128,54.773 128.5,54.273 v1(128.5,53.8)
  Bottom Layer w0.3: v1(128.5,53.8) 129.9,52.4 137.2,52.4 138.05,53.25 138.05,61.05 137.5,61.6 v1(137.5,63.1)
NetQ1_3: Q1.3 R8.2 | length 6.1
  Top Layer w0.3: R8.2@43.025,63.775 41.6,65.2 41.6,67.3 42.25,67.95 Q1.3
NetQ2_3: Q2.3 R14.2 | length 1.4
  Top Layer w0.3: R14.2 136.7,66.025 Q2.3
NetR18_1: R18.1 R19.2 U4.5 | length 12
  Bottom Layer w0.3: R18.1 96.4,70.9 96.6,71.1 99.9,71.1 100.6,70.4 100.6,66.7 99.95,66.05 U4.5 R19.2
PIXCLK1: MT1.46 U1.27 | length 29.2
  Top Layer w0.3: MT1.46 48,43.2 48.8,42.4 53.437,42.4 53.937,41.9 56.9,41.9 59.3,44.3 71.62,44.3 U1.27
PIXCLK2: MT2.46 U1.42 | length 61.5
  Top Layer w0.3: v1(91.1,47) 93.6,47 94.9,45.7 104.7,45.7 v1(104.8,45.8) ; v1(109.5,44.6) 110.292,43.808 110.292,41.508 112,39.8 124.59,39.8 127.9,43.11 127.9,44.414 MT2.46 ; v1(104.8,45.8) 104.8,46 105,45.8 v1(104.8,45.8)
  Bottom Layer w0.3: U1.42 77.28,48.8 87.473,48.8 89.273,47 v1(91.1,47) ; v1(104.8,45.8) 109.2,45.8 109.5,45.5 v1(109.5,44.6)
SCL: MT1.25 MT2.25 R2.1 U1.19 | length 95.1
  Top Layer w0.3: MT1.25 49.7,55.586 49.7,56.953 55.099,62.352 86.711,62.352 88.5,60.563 88.5,60.295 88.995,59.8 89.873,59.8 99.3,59.8 U1.19 102.672,56.428 104.502,56.428 105.328,57.254 105.328,58.701 109.927,63.3 117.037,63.3 117.437,62.9 118.7,62.9 v1(119,62.6) ; v1@125.391,58.622 127.306,58.011 129.159,56.998 129.489,56.312 MT2.25
  Bottom Layer w0.3: U1.19 101.5,57.6 R2.1 ; v1(119,62.6) 120,62.6 123.951,58.649 v1(125.4,58.649)
SDA: MT1.24 MT2.24 R3.1 U1.18 | length 94.7
  Top Layer w0.3: MT1.24 50.4,56.663 55.389,61.652 86.421,61.652 87.8,60.273 87.8,60.005 88.705,59.1 90.163,59.1 98.34,59.1 98.92,58.52 U1.18 100.832,55.728 106.342,55.728 107.868,57.254 107.868,58.142 108.578,58.852 109.052,58.852 110.9,60.7 119.679,60.7 v1(121.437,62.459) ; v1(126.543,59.36) 127.893,58.488 129.819,57.455 130.353,56.286 MT2.24
  Bottom Layer w0.3: U1.18 99,57.56 R3.1 ; v1(121.437,62.459) 124.347,59.549 126.354,59.549 v1(126.543,59.36)
STANDBY: MT1.33 MT2.33 U1.0 | length 111.5
  Top Layer w0.3: MT1.33 44.414,52.7 43.5,52.7 42.3,51.5 42.3,40.91 47.622,35.588 114.461,35.588 v1(117,38.127) ; v1(116.7,47.6) 116.7,47.5 116.8,47.4 122.1,52.7 124.414,52.7 MT2.33
  Bottom Layer w0.3: v1(116.7,47.6) U1.0 ; v1(117,38.127) 117,42.1 U1.0 ; U1.0@117.021,42.721 U1.0
STFRM_OUT: MT1.26 MT2.26 U1.30 | length 117.1
  Top Layer w0.3: v1(48.8,54.3) MT1.26 ; U1.30 67.812,40.488 80.115,40.488 80.527,40.9 82.4,40.9 84.2,39.1 87,39.1 87.4,39.5 v1(87.4,39.6) ; v1(94.5,38.1) 94.6,38 v1(115.6,38) ; v1(118,46.9) 117.69,46.9 117.845,46.745 117.8,46.7 116.327,46.7 115.8,47.227 115.8,47.973 116.332,48.505 116.905,48.505 124.19,55.79 124.2,55.79 124.2,56.61 124.976,57.386 126.946,57.386 126.949,57.39 128.346,56.642 128.702,56.286 MT2.26
  Bottom Layer w0.3: v1(48.8,54.3) 48.7,54.3 50.342,55.942 59.352,55.942 59.904,55.389 59.904,54.131 59.608,53.835 59.608,52.058 60.318,51.348 61.206,51.348 62.1,50.454 62.1,46.2 63.7,44.6 64.8,44.6 65.5,43.9 65.5,42.8 U1.30 ; v1(87.4,39.6) 87.9,39.1 90.5,39.1 91,39.6 92.773,39.6 94.273,38.1 v1(94.5,38.1) ; v1(115.6,38) 116.373,37.227 117.373,37.227 117.9,37.754 117.9,38.4 118.028,38.528 118,38.556 v1(118,46.9)
STLN_OUT1: R10.2 U1.31 | length 3.1
  Bottom Layer w0.3: R10.2@63.3,39.3 63.3,42.34 U1.31
STLN_OUT2: R13.2 U1.32 | length 3.1
  Bottom Layer w0.3: U1.32 60.9,42.32 R13.2@60.9,39.3
SYSCLK: MT1.47 MT2.47 U1.3 | length 94.8
  Top Layer w0.3: MT1.47 48.8,43.436 49.136,43.1 53.727,43.1 54.227,42.6 56.61,42.6 59.01,45 75.047,45 75.747,44.3 79.727,44.3 80.827,45.4 81.573,45.4 82.352,44.621 82.352,42.014 84.366,40 v1(86.2,40) ; v1(92.4,38.7) 92.7,39 113.5,39 113.6,39.1 124.88,39.1 128.6,42.82 128.6,43.612 128.8,43.812 MT2.47 ; 109.08,39.1 U1.3
  Bottom Layer w0.3: v1(86.2,40) 86.2,39.1 86.9,38.4 90.8,38.4 91.1,38.7 v1(92.4,38.7)
pads on no net: MT1.2 MT1.3 MT1.4 MT1.5 MT1.36 MT1.37 MT2.2 MT2.3 MT2.4 MT2.5 MT2.36 MT2.37 U1.1 U1.4 U1.16 U1.17 U1.24 U1.28 U1.33 U1.34 U1.37 U1.38 U1.39 U1.43 U1.44 U1.45 U1.46 U1.49 U1.50 U1.51 U1.52 U1.53 U1.A21 U1.A22 U1.AGND U1.PROG

## Polygon pours and split planes (outlines as drawn)
GND on Bottom Layer "L4 - Bottom Layer-GND" (solid, remove dead copper, pour order 0): 33.9,79.6 148.5,79.6 148.7,79.8 148.7,26.7 145.2,23.2 33.9,23.2
GND on Top Layer "L1 - Top Layer-GND" (solid, remove dead copper, pour order 2): 34.7,79.3 148,79.3 148,23.5 34.6,23.5 34.6,37.9

## Keep-outs
Keep-Out Layer:
  the board outline again, w0.3

## Other copper
Top Layer:
  text "BoredomProjects.net" at 39,25.9 h1.02
  text "TOP" at 137,25.9 h1.52
Bottom Layer:
  rectangle net 3V3_UC: 90.6,65.4 91.9,67
  region net NetL3_1: 94.6,68.2 95.4,68.2 95.9,67.7 97.1,67.7 97.1,68.2 96.6,68.95 96.6,69.6 96.2,70 94.6,70
  region net GND: 94.7,67 95.1,67 95.4,67.3 97.3,67.3 97.5,67.5 97.5,69.9 98.3,69.9 98.3,64.2 97.8,64.2 97.5,64.5 97.5,66.5 97.3,66.7 96.1,66.7 95.8,66.4 95.8,65.8 95.4,65.4 94.7,65.4
  region net GND: 112.9,68.9 113.4,68.9 114,68.3 115.4,68.3 115.6,68.5 115.6,70.1 115.4,70.2 115.4,70.6 115.6,71.3 116.2,71.3 116.2,70.3 116.4,70.1 116.4,66.5 116.5,66.4 118.7,66.4 119,66.7 119.5,66.7 119.5,65.8 119.3,65.6 115.6,65.6 115.6,67.6 115.5,67.7 113.7,67.7 113.3,68.1 112.9,68.1
  region net GND: 60,68.9 60.5,68.9 61.1,68.3 62.5,68.3 62.7,68.5 62.7,71.3 63.3,71.3 63.5,71.1 63.5,66.5 63.6,66.4 65.8,66.4 66.2,66.8 66.6,66.8 66.6,65.7 66.1,65.2 62.7,65.2 62.7,67.6 62.6,67.7 60.8,67.7 60.4,68.1 60,68.1
  text "BOT" at 141,25.9 h1.52

## Silkscreen, mask and mechanical layers (free items; w line width, h text height)
Wires:
  lines w1: 70.98,57.64 78.6,42.4 ; 73.52,57.64 76.06,42.4 ; 78.6,50.02 ccw(c78.248,51.29) 78.6,52.56 ; 81.14,50.02 ccw(c80.788,51.29) 81.14,52.56